# Altium PCB CustomTP4056Module.PcbDoc
Units mil, origin at the board's own origin, x right, y up, seen from the top; angles counter-clockwise.
Board outline 6000 x 4000 mil, 2 copper layers (Top Layer, Bottom Layer); 2 components, 2 nets, 11 pads, 0 vias.
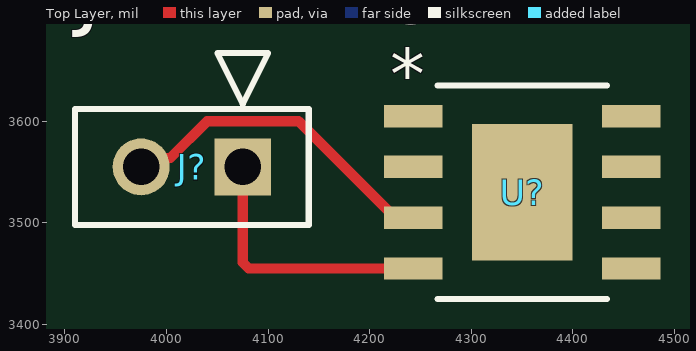
[diagram p0: Top Layer view]
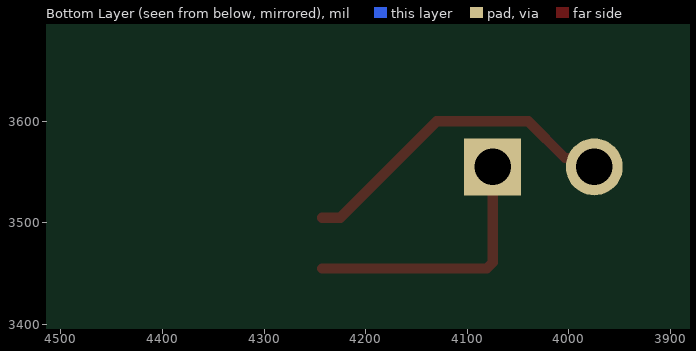
[diagram p1: Bottom Layer view, seen from below]

## Layer stack, top to bottom
Top Solder: solder mask 0.4, Solder Resist, Dk 3.5
Top Layer: signal copper 1.4
Dielectric 1: dielectric 12.6, FR-4, Dk 4.8
Bottom Layer: signal copper 1.4
Bottom Solder: solder mask 0.4, Solder Resist, Dk 3.5

## Board outline
1000,1000 7000,1000 7000,5000 1000,5000

## Design rules (kind name [scope] priority, off if disabled: settings)
Clearance [All] p1: gap=10 ignorepadtopadclearanceinfootprint=FALSE
PolygonConnect [All] p1: connectstyle=Relief reliefconductorwidth=10 reliefentries=4 polygonreliefangle="90 Angle" airgapwidth=10
RoutingVias [All] p1: holewidth=28 width=50 viastyle="Through Hole" minholewidth=28 minwidth=50 maxholewidth=28 maxwidth=50
SolderMaskExpansion [All] p1: expansion=4 istentingtop=FALSE
Width [All] p1: maxlimit=10 minlimit=10 preferedwidth=10
30 further rules are at their usual default settings.

## Components (designator, comment, footprint, x,y, rotation, side; value= is the part's Value field where it differs from the comment)
J? "M20-9990245" CONN_M20-99902_HRW 4075,3555 r0 top
U? "TP4056" ESOP8_TPW 4350,3530 r0 top

## Footprints (in the part's own frame and the unit in brackets; to place one, negate y for a bottom-side part, rotate by r counter-clockwise, add the part's x,y. Pads: shape width x height; smd on the part's side, far side on the other; paste and mask are expansions set on the pad)
CONN_M20-99902_HRW [mil]
  rect 56x56 / inner round 60 / far side rect 56x56 hole 36 paste-99999 mask+0: 1(0,0)
  round 56 / inner round 60 / far side round 56 hole 36 paste-99999 mask+0: 2(-100,0)
  silkscreen extent -165,-57 65,112, body extent -150,-492 50,12, height 100
ESOP8_TPW [mil]
  rect 57.5x22 smd paste+0 mask+0: 1(-107.25,75) 2(-107.25,25) 3(-107.25,-25) 4(-107.25,-75) 5(107.25,-75) 6(107.25,-25) 7(107.25,25) 8(107.25,75)
  rect 99x134 smd paste-66.5 mask+0: 9(0,0)
  silkscreen extent -84,-105 84,105, body extent -122,-100 122,100, height 69

## Part data
J?: "No Description Available", Mfr_Name=Harwin, RefDes=RefDes, Type=Type
U?: "No Description Available", Mfr_Name=TOPPOWER, RefDes=RefDes, Type=Type

## Nets (pads, with @x,y where several pads share a name; then routed paths per layer and width w, separated by ;. In a path a pad name is that pad's centre, name@x,y a point inside that pad or via, vN(x,y) a via of type N, cw(c..) or ccw(c..) an arc to the next point about the centre after c; other vN are vias at no path point)
NetJ?_1: J?.1 U?.4 | length 264.3
  Top Layer w10: J?.1 4075,3460.86 4080.86,3455 U?.4
NetJ?_2: J?.2 U?.3 | length 325.7
  Top Layer w10: J?.2 3983.8,3563.8 4003.8,3563.8 4040,3600 4130,3600 4225,3505 U?.3
pads on no net: U?.1 U?.2 U?.5 U?.6 U?.7 U?.8 U?.9

## Text inside footprints (layer, text, board x,y; h text height)
U?: Top Overlay "*" at 4220.25,3622 h50; Mechanical 13 "*" at 4274,3577 h50